# Altium PCB main.PcbDoc (part 2 of 2)
Units mm, origin at the board's own origin, x right, y up, seen from the top; angles counter-clockwise.
Board outline 137 x 49 mm, 4 copper layers (Top Layer, Layer 1, Layer 2, Bottom Layer), stack 0.569 mm thick; 56 components, 56 nets, 326 pads, 215 vias.
Unrouted connection lines stored in the file: 1.
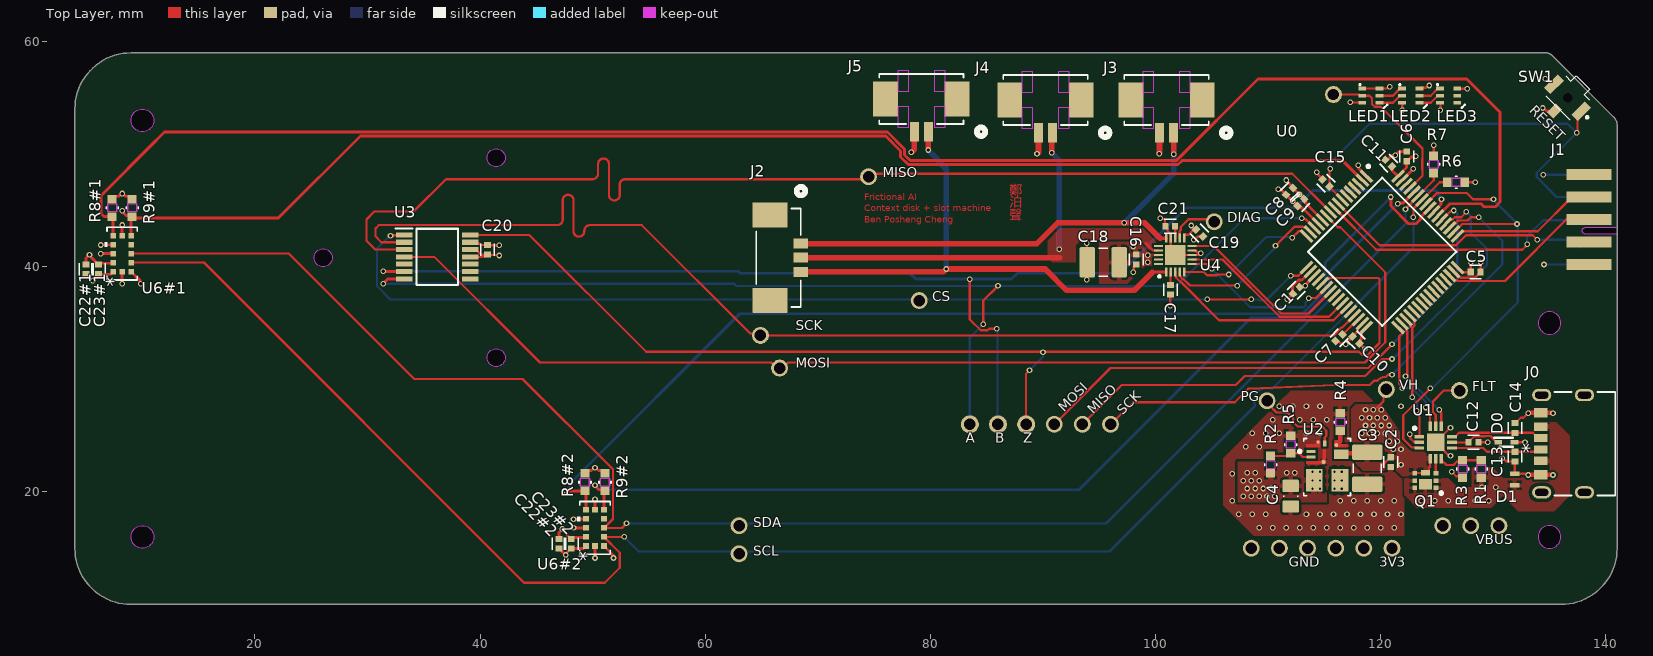
[diagram p0: Top Layer view]

## Polygon pours and split planes (outlines as drawn) (continued)
VBUS on Layer 2 (split plane): 140.49,15 140.49,14.706 140.413,14.122 140.26,13.554 140.035,13.01 139.741,12.5 139.383,12.033 138.966,11.617 138.5,11.259 137.99,10.965 137.446,10.74 136.878,10.587 136.294,10.51 136,10.51 121.694,10.51 122.392,11.208 122.42,11.25 122.429,11.3 122.429,18.322 122.431,18.324 122.446,18.361 122.451,18.4 122.446,18.439 122.431,18.476 122.429,18.478 122.429,25.722 122.431,25.724 122.446,25.761 122.451,25.8 122.446,25.839 122.431,25.876 122.429,25.878 122.429,28.246 125.054,30.871 140.49,30.871
VH on Layer 2 (split plane): 108.693,33.793 108.724,33.769 108.761,33.754 108.8,33.749 114.137,33.749 120.893,26.993 122.171,25.716 122.171,18.743 112.007,28.907 111.976,28.931 111.939,28.946 111.9,28.951 106.863,28.951 99.007,36.807 98.976,36.831 98.939,36.846 98.9,36.851 93.363,36.851 92.551,37.663 92.551,42.549 99.937,42.549

## Other copper
Top Layer:
  text "鄭" at 87,46.08 h1.5
  text "泊" at 87,45.014 h1.5
  text "聲" at 87,43.875 h1.5
  text "Frictional AI / Context disk + slot machine / Ben Posheng Cheng" at 74.1,43.702 h1
Layer 2 (plane layer: these items are gaps in the copper):
  lines w0.254: 121,10 122.3,11.3 122.3,28.3 125,31 140.9,31
  lines w0.3: 122.3,18.4 111.9,28.8 111.6,28.8 106.8,28.8 98.9,36.7 93.3,36.7 92.4,37.6 92.4,42.7 100,42.7 108.8,33.9 114.2,33.9 121,27.1 ; 122.3,25.8 121,27.1 ; 121,27.1 121,27.1

## Silkscreen, mask and mechanical layers (free items; w line width, h text height)
Top Overlay:
  text "RESET" at 132.922,53.608 h1.5 r315
  text "MISO" at 75.75,47.631 h1.5
  text "DIAG" at 106.351,43.631 h1.5
  text "CS" at 80.15,36.631 h1.5
  text "SCK" at 68.051,34.031 h1.5
  text "MOSI" at 68.05,30.731 h1.5
  text "VH" at 121.651,28.745 h1.5
  text "FLT" at 128.15,28.645 h1.5
  text "PG" at 107.551,27.731 h1.5
  text "MOSI" at 92.091,26.821 h1.5 r45
  text "MISO" at 94.691,26.621 h1.5 r45
  text "SCK" at 97.292,26.522 h1.5 r45
  text "A" at 83.151,24.045 h1.5
  text "B" at 85.75,24.045 h1.5
  text "Z" at 88.251,24.045 h1.5
  text "SDA" at 64.251,16.531 h1.5
  text "VBUS" at 128.451,15.031 h1.5
  text "SCL" at 64.251,14.031 h1.5
  text "GND" at 111.85,13.031 h1.5
  text "3V3" at 119.85,13.031 h1.5
Top Solder:
  text "鄭" at 87,46.08 h1.5
  text "泊" at 87,45.014 h1.5
  text "聲" at 87,43.875 h1.5
  text "Frictional AI / Context disk + slot machine / Ben Posheng Cheng" at 74.1,43.702 h1
Mechanical 1:
  circle w0.013: c36.3,40.8 r5.75
  circle w0.013: c41.425,49.677 r0.8
  circle w0.013: c41.425,31.923 r0.8
  circle w0.013: c26.05,40.8 r0.8
  circle w0.013: c36.3,40.8 r16
  circle w0.006: c36.3,40.8 r0.003
  lines w0.013: 36.3,40.8 56.3,40.8
  lines w0.2: 56.3,40.8 77.9,40.8
  lines w0.254: 8.201,41.1 ccw(c36.203,40.9) 18.468,62.572
Board Shape:
  drawing of 305 lines, arcs and shapes, not listed

## Dimensions
56.3,40.8 to 8.201,41.1 on Mechanical 1
148.3,59 to 150.3,10.3 on Mechanical 1
0.1,6.2 to 140.8,4.7 on Mechanical 1
45.2,41.5 to 66.1,41 on Mechanical 1

## Text inside footprints (layer, text, board x,y; h text height)
J0: Top Overlay "*" at 133.825,23.454 h1.27 r90; Mechanical 13 "*" at 135.603,23.454 h1.27 r90
U6#1: Top Overlay "*" at 8.035,38.212 h1.27 r90; Mechanical 13 "*" at 8.035,40.287 h1.27 r90
U6#2: Top Overlay "*" at 50.035,13.845 h1.27 r90; Mechanical 13 "*" at 50.035,15.92 h1.27 r90